# EAGLE board new moisture ckt design (EAGLE 9.6.2)
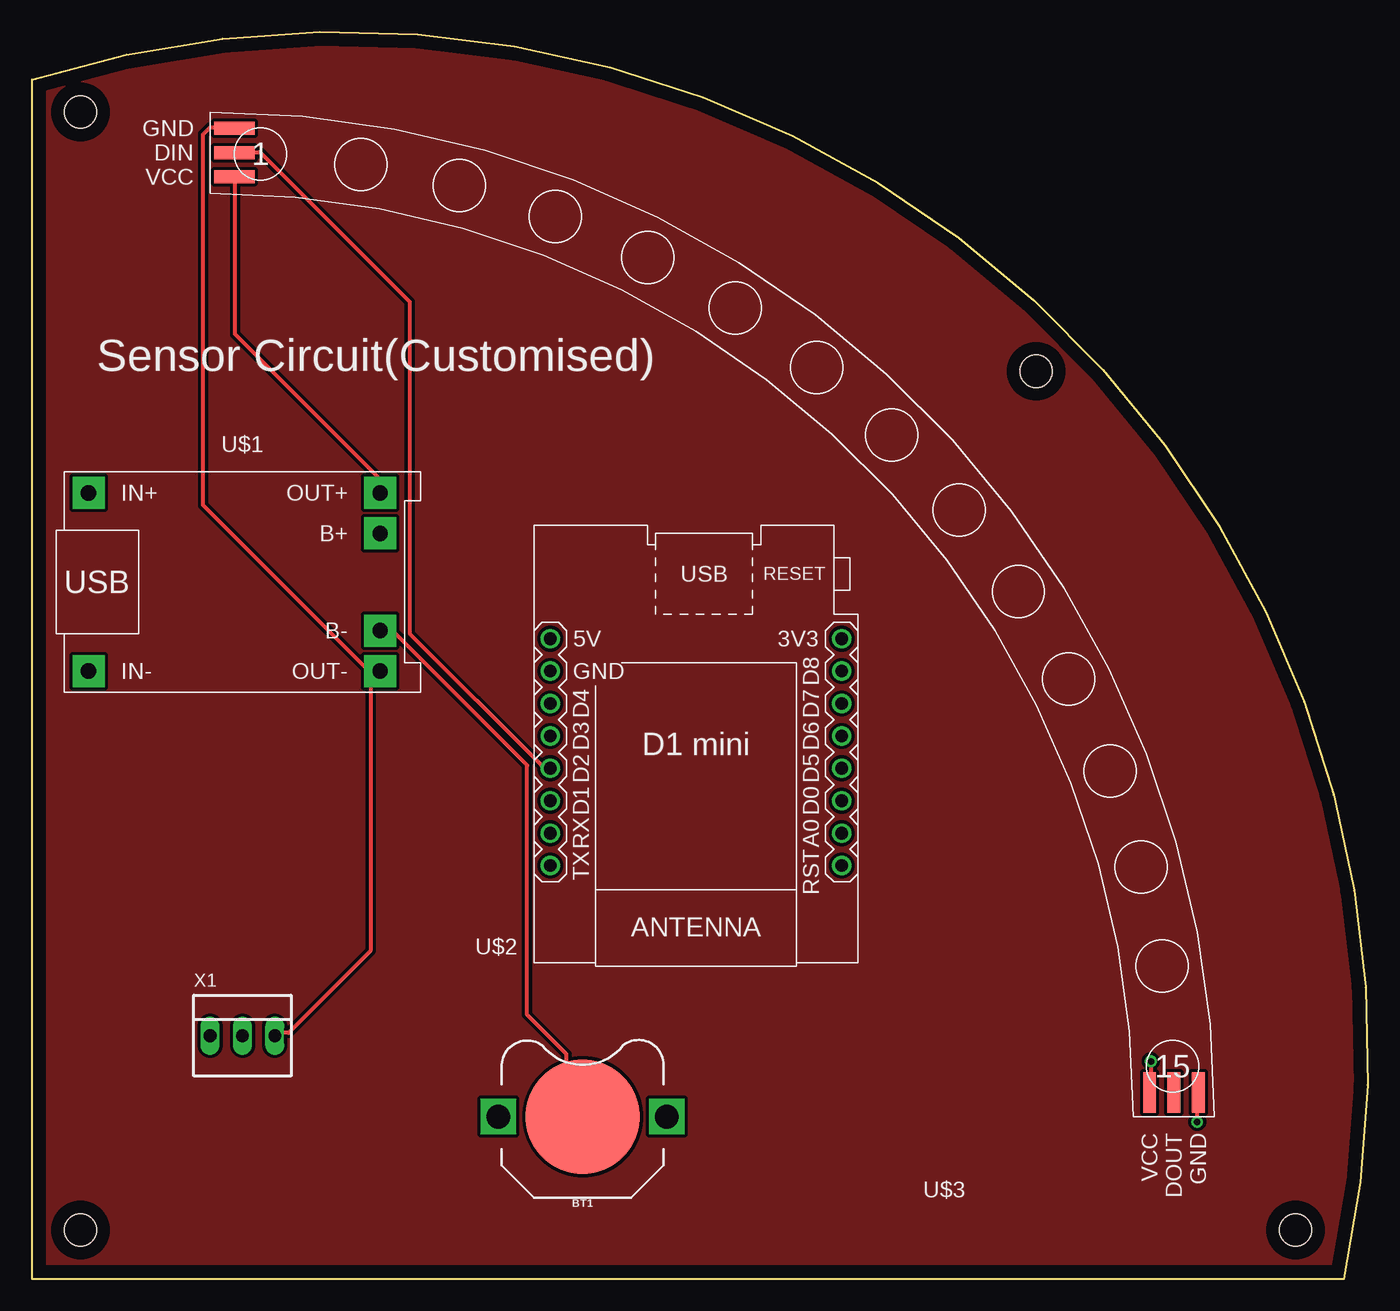
[diagram p0: board, top side]
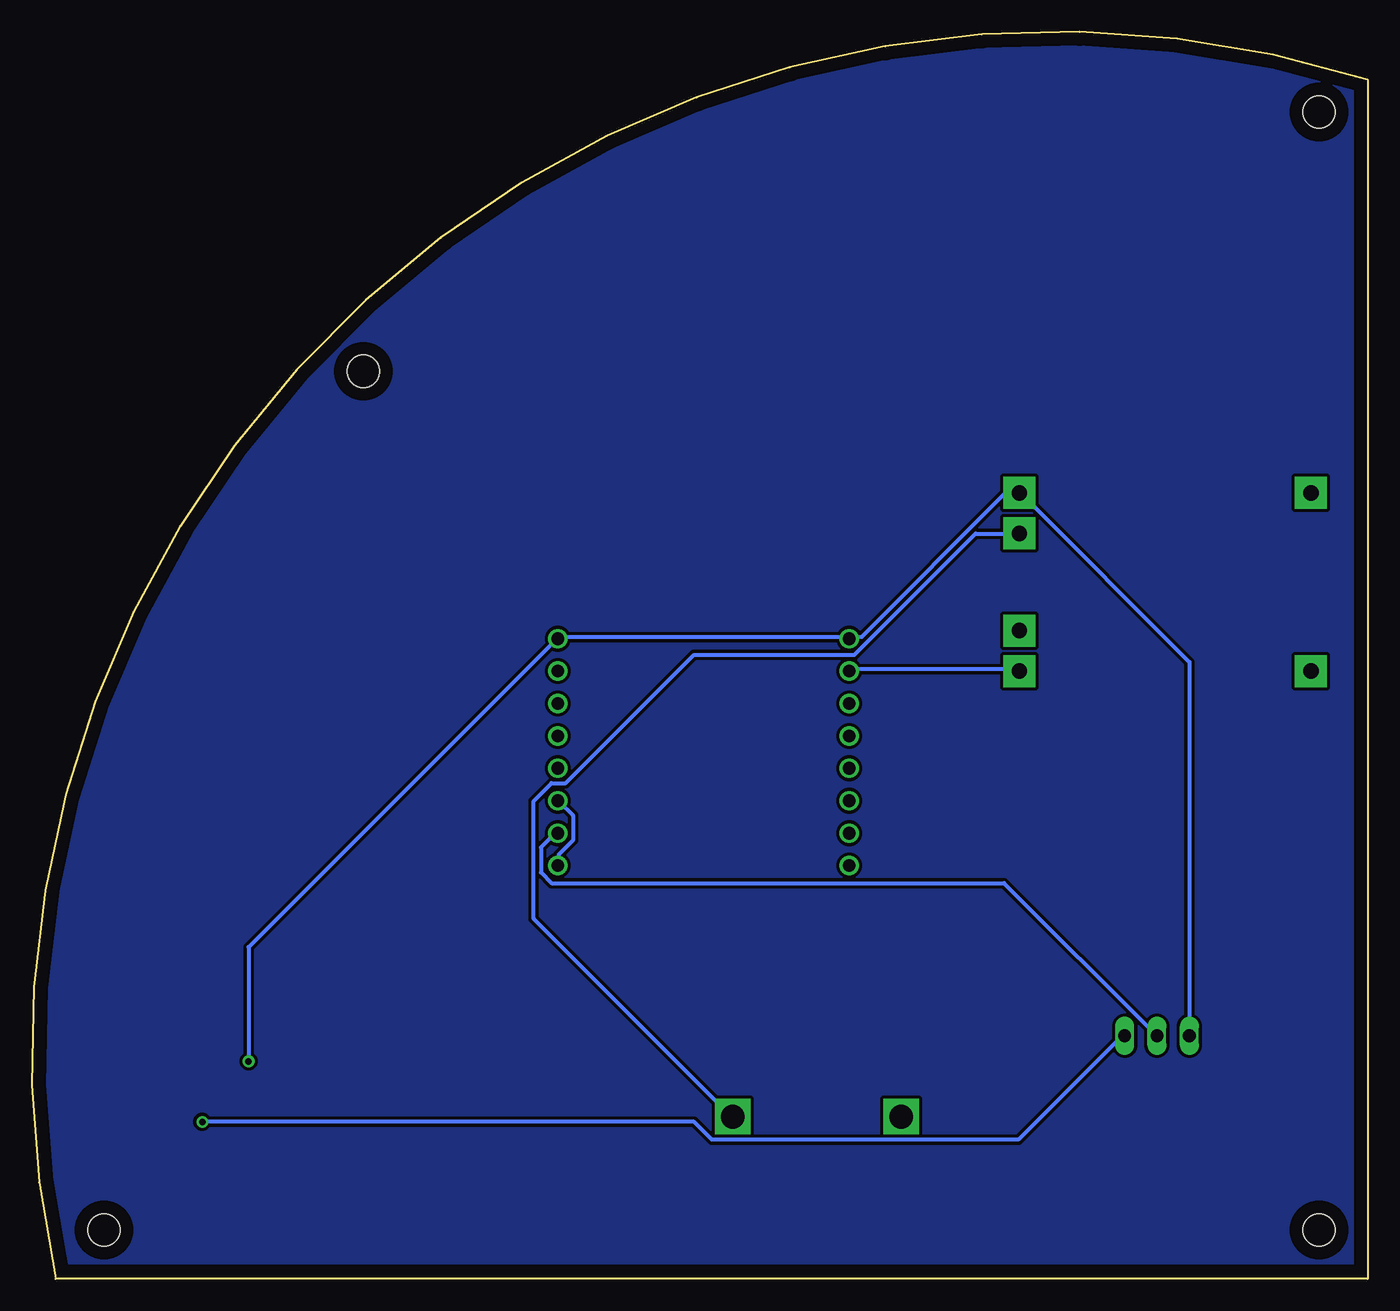
[diagram p1: board, bottom side, seen from below]

Size 104.72 x 97.72 mm. Coordinates in mm from the lower left corner, seen from the top.
Outline: 0,93.98 arc-120 102.87,0 0,0 0,93.98
Copper layers (1*16): Top 0.035mm / dielectric 1.5mm / Bottom 0.035mm
Design rules "default": minimum track width 6mil, minimum drill 0.35mm, track to track 6mil, track to pad 6mil, pad to pad 6mil, via to via 6mil, smd to smd 6mil, copper to edge 40mil, drill to drill 6mil, minimum pad ring 10mil, minimum via ring 8mil, stop-mask expansion 4mil, vias tented up to drill 0mil, thermal gap 10mil
Net classes: 0 default: width 0.305 mm, drill 0.508 mm, clearance 0.254 mm
Holes 2.54 mm at 3.81,3.81 99.06,3.81 78.74,71.12 3.81,91.44

## Footprints (pad centres in the part's own frame; a part is rotated, then mirrored left to right if it is on the bottom)
BATTCON_12MM_PTH = smd 9 x 9: GND 0,0 | drill 1.854 square: VCC@1 6.604,0; VCC@2 -6.604,0
BATTERY-CHARGER-LI-PROT = drill 1.2 pad 2.5 square: B+ 10.795,3.81; B- 10.795,-3.81; IN+ -12.065,6.985; IN- -12.065,-6.985; OUT+ 10.795,6.985; OUT- 10.795,-6.985
WEMOS-D1-MINI = drill 1: JP1.1 -11.43,9.525; JP1.2 -11.43,6.985; JP1.3 -11.43,4.445; JP1.4 -11.43,1.905; JP1.5 -11.43,-0.635; JP1.6 -11.43,-3.175; JP1.7 -11.43,-5.715; JP1.8 -11.43,-8.255; JP2.1 11.43,9.525; JP2.2 11.43,6.985; JP2.3 11.43,4.445; JP2.4 11.43,1.905; JP2.5 11.43,-0.635; JP2.6 11.43,-3.175; JP2.7 11.43,-5.715; JP2.8 11.43,-8.255
LED-15XRGB-QRING = smd 3.175 x 1.016: 1 1.905,77.47; 2 1.905,75.565; 3 1.905,73.66 | smd 1.016 x 3.175: 4 77.47,1.905; 5 75.565,1.905; 6 73.66,1.905
22-23-2031 = drill 1 long: 1 -2.54,0; 2 0,0; 3 2.54,0

## Placement (x,y rotation side)
BT1  [BATTCON_12MM_PTH]  43.18,12.7 0 top
U$1  BATTERY-CHARGER-LI-PROT  [BATTERY-CHARGER-LI-PROT]  16.51,54.61 0 top
U$2  WEMOS-D1-MINI  [WEMOS-D1-MINI]  52.07,41.91 180 top
U$3  LED-15XRGB-QRING  [LED-15XRGB-QRING]  13.97,12.7 0 top
X1  22-23-2031  [22-23-2031]  16.51,19.05 0 top

## Library data of the parts
BT1 = SparkFun-Batteries; PROD_ID: BATT-08315; SF_SKU: PRT-07948
U$1-U$3 = diy-modules
X1 = con-molex; MF: MOLEX; MPN: 22-23-2031; OC_FARNELL: 1462950; OC_NEWARK: 30C0862

## Nets
N$1: U$2.JP1.1 U$2.JP1.3
N$2: U$2.JP1.2 X1.2
N$3: U$1.OUT+ U$2.JP1.8 U$2.JP2.8 U$3.3 U$3.6 X1.1
N$4: U$1.OUT- U$2.JP2.7 U$3.1 U$3.4 X1.3
N$6: BT1.GND U$1.B-
N$7: BT1.VCC@1 U$1.B+
N$9: U$2.JP2.4 U$3.2

## Tracks (layer width: path | path; a pad name or v marks a point on that pad's centre or on a via)
GND
  pour Top: 0,93.98 0,0 102.87,0 arc120
N$1
  Bottom 0.305: U$2.JP1.1 63.42,32.41 63.42,33.25 62.31,34.37 62.31,36.32 63.42,37.44 U$2.JP1.3
N$2
  Bottom 0.305: X1.2 16.76,19.28 28.5,31.01 63.98,31.01 64.82,31.85 64.82,33.81 63.7,34.92 U$2.JP1.2
N$3  (via drill 0.51)
  Top 0.305: v87.73,17.04 87.73,14.81 U$3.6 | U$3.3 15.93,86.33 15.93,74.04 27.1,62.87 27.1,61.75 U$1.OUT+
  Bottom 0.305: X1.1 13.97,48.34 27.1,61.47 U$1.OUT+ 27.38,61.47 28.5,61.47 39.67,50.29 40.51,50.29 U$2.JP2.8 40.79,50.29 63.42,50.29 U$2.JP1.8 63.7,50.01 87.73,25.98 v87.73,17.04
N$4  (via drill 0.51)
  Top 0.305: 26.82,47.22 27.1,47.5 U$1.OUT- 26.82,47.22 | 26.82,47.22 26.54,46.94 26.54,25.7 20.12,19.28 19.28,19.28 X1.3 | v91.36,12.29 91.36,14.53 U$3.4 | 26.82,47.22 13.41,60.63 13.41,89.69 13.97,90.25 15.65,90.25 U$3.1
  Bottom 0.305: U$2.JP2.7 40.51,47.78 27.38,47.78 U$1.OUT- | v91.36,12.29 52.81,12.29 51.41,10.9 27.38,10.9 19.28,19 X1.3
N$5
  pour Bottom: 102.87,0 0,0 0,93.98 arc-120
N$6
  Top 0.305: BT1.GND 41.91,13.97 41.91,17.6 38.84,20.68 38.84,40.23 28.5,50.57 27.38,50.57 U$1.B-
N$7
  Bottom 0.305: U$1.B+ 27.38,58.4 30.73,58.4 40.23,48.9 52.81,48.9 62.87,38.84 63.98,38.84 65.38,37.44 65.38,28.22 50.01,12.85 BT1.VCC@1
N$9
  Top 0.305: U$2.JP2.4 40.51,40.23 39.95,40.23 29.62,50.57 29.62,76.56 17.88,88.29 15.93,88.29 U$3.2

## Text on the board
tPlace: Sensor Circuit(Customised)